# EAGLE board compilacion ws2812b br (EAGLE 7.3.0)
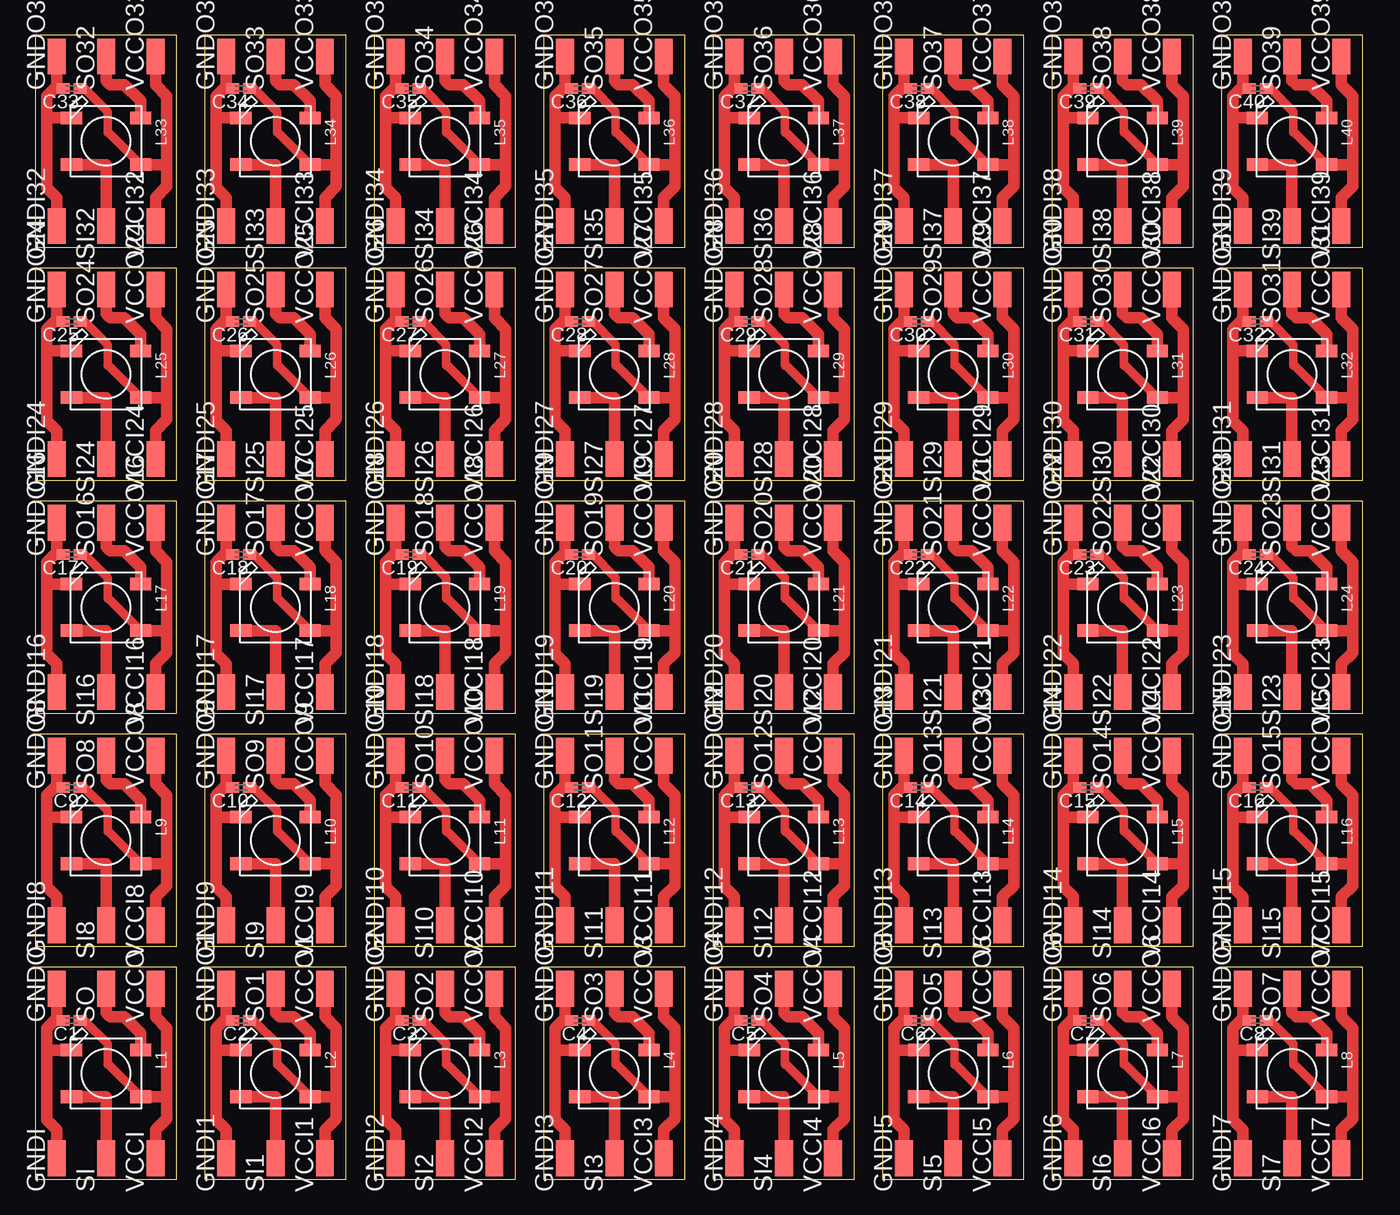
[diagram p0: board, top side]

Size 94 x 81 mm. Coordinates in mm from the lower left corner, seen from the top.
Outline: 0,0 10,0 10,15 0,15 0,0
Outline: 12,0 22,0 22,15 12,15 12,0
Outline: 24,0 34,0 34,15 24,15 24,0
Outline: 36,0 46,0 46,15 36,15 36,0
Outline: 48,0 58,0 58,15 48,15 48,0
Outline: 60,0 70,0 70,15 60,15 60,0
Outline: 72,0 82,0 82,15 72,15 72,0
Outline: 84,0 94,0 94,15 84,15 84,0
Outline: 0,16.5 10,16.5 10,31.5 0,31.5 0,16.5
Outline: 12,16.5 22,16.5 22,31.5 12,31.5 12,16.5
Outline: 24,16.5 34,16.5 34,31.5 24,31.5 24,16.5
Outline: 36,16.5 46,16.5 46,31.5 36,31.5 36,16.5
Outline: 48,16.5 58,16.5 58,31.5 48,31.5 48,16.5
Outline: 60,16.5 70,16.5 70,31.5 60,31.5 60,16.5
Outline: 72,16.5 82,16.5 82,31.5 72,31.5 72,16.5
Outline: 84,16.5 94,16.5 94,31.5 84,31.5 84,16.5
Outline: 0,33 10,33 10,48 0,48 0,33
Outline: 12,33 22,33 22,48 12,48 12,33
Outline: 24,33 34,33 34,48 24,48 24,33
Outline: 36,33 46,33 46,48 36,48 36,33
Outline: 48,33 58,33 58,48 48,48 48,33
Outline: 60,33 70,33 70,48 60,48 60,33
Outline: 72,33 82,33 82,48 72,48 72,33
Outline: 84,33 94,33 94,48 84,48 84,33
Outline: 0,49.5 10,49.5 10,64.5 0,64.5 0,49.5
Outline: 12,49.5 22,49.5 22,64.5 12,64.5 12,49.5
Outline: 24,49.5 34,49.5 34,64.5 24,64.5 24,49.5
Outline: 36,49.5 46,49.5 46,64.5 36,64.5 36,49.5
Outline: 48,49.5 58,49.5 58,64.5 48,64.5 48,49.5
Outline: 60,49.5 70,49.5 70,64.5 60,64.5 60,49.5
Outline: 72,49.5 82,49.5 82,64.5 72,64.5 72,49.5
Outline: 84,49.5 94,49.5 94,64.5 84,64.5 84,49.5
Outline: 0,66 10,66 10,81 0,81 0,66
Outline: 12,66 22,66 22,81 12,81 12,66
Outline: 24,66 34,66 34,81 24,81 24,66
Outline: 36,66 46,66 46,81 36,81 36,66
Outline: 48,66 58,66 58,81 48,81 48,66
Outline: 60,66 70,66 70,81 60,81 60,66
Outline: 72,66 82,66 82,81 72,81 72,66
Outline: 84,66 94,66 94,81 84,81 84,66
Copper layers (1*16): Top 0.035mm / dielectric 1.5mm / Bottom 0.035mm
Design rules "default": minimum track width 10mil, minimum drill 24mil, track to track 8mil, track to pad 8mil, pad to pad 8mil, via to via 8mil, smd to smd 8mil, copper to edge 40mil, drill to drill 8mil, minimum pad ring 10mil, minimum via ring 8mil, stop-mask expansion 4mil, vias tented up to drill 0mil, thermal gap 10mil

## Footprints (pad centres in the part's own frame; a part is rotated, then mirrored left to right if it is on the bottom)
C0402K = smd 0.925 x 0.74: 1 -0.6,0; 2 0.6,0
SMD1,27-2,54 = smd 1.27 x 2.54: 1 0,0
WS2812B = smd 1.5 x 0.9: 1-VDD 2.45,-1.65; 2-DOUT 2.45,1.65; 3-GND -2.45,1.65; 4-DIN -2.45,-1.65

## Placement (x,y rotation side)
C1  0.1uF  [C0402K]  2.57,11.24 180 top
C2  0.1uF  [C0402K]  14.57,11.24 180 top
C3  0.1uF  [C0402K]  26.57,11.24 180 top
C4  0.1uF  [C0402K]  38.57,11.24 180 top
C5  0.1uF  [C0402K]  50.57,11.24 180 top
C6  0.1uF  [C0402K]  62.57,11.24 180 top
C7  0.1uF  [C0402K]  74.57,11.24 180 top
C8  0.1uF  [C0402K]  86.57,11.24 180 top
C9  0.1uF  [C0402K]  2.57,27.74 180 top
C10  0.1uF  [C0402K]  14.57,27.74 180 top
C11  0.1uF  [C0402K]  26.57,27.74 180 top
C12  0.1uF  [C0402K]  38.57,27.74 180 top
C13  0.1uF  [C0402K]  50.57,27.74 180 top
C14  0.1uF  [C0402K]  62.57,27.74 180 top
C15  0.1uF  [C0402K]  74.57,27.74 180 top
C16  0.1uF  [C0402K]  86.57,27.74 180 top
C17  0.1uF  [C0402K]  2.57,44.24 180 top
C18  0.1uF  [C0402K]  14.57,44.24 180 top
C19  0.1uF  [C0402K]  26.57,44.24 180 top
C20  0.1uF  [C0402K]  38.57,44.24 180 top
C21  0.1uF  [C0402K]  50.57,44.24 180 top
C22  0.1uF  [C0402K]  62.57,44.24 180 top
C23  0.1uF  [C0402K]  74.57,44.24 180 top
C24  0.1uF  [C0402K]  86.57,44.24 180 top
C25  0.1uF  [C0402K]  2.57,60.74 180 top
C26  0.1uF  [C0402K]  14.57,60.74 180 top
C27  0.1uF  [C0402K]  26.57,60.74 180 top
C28  0.1uF  [C0402K]  38.57,60.74 180 top
C29  0.1uF  [C0402K]  50.57,60.74 180 top
C30  0.1uF  [C0402K]  62.57,60.74 180 top
C31  0.1uF  [C0402K]  74.57,60.74 180 top
C32  0.1uF  [C0402K]  86.57,60.74 180 top
C33  0.1uF  [C0402K]  2.57,77.24 180 top
C34  0.1uF  [C0402K]  14.57,77.24 180 top
C35  0.1uF  [C0402K]  26.57,77.24 180 top
C36  0.1uF  [C0402K]  38.57,77.24 180 top
C37  0.1uF  [C0402K]  50.57,77.24 180 top
C38  0.1uF  [C0402K]  62.57,77.24 180 top
C39  0.1uF  [C0402K]  74.57,77.24 180 top
C40  0.1uF  [C0402K]  86.57,77.24 180 top
GNDI  [SMD1,27-2,54]  1.5,1.5 0 top
GNDI1  [SMD1,27-2,54]  13.5,1.5 0 top
GNDI2  [SMD1,27-2,54]  25.5,1.5 0 top
GNDI3  [SMD1,27-2,54]  37.5,1.5 0 top
GNDI4  [SMD1,27-2,54]  49.5,1.5 0 top
GNDI5  [SMD1,27-2,54]  61.5,1.5 0 top
GNDI6  [SMD1,27-2,54]  73.5,1.5 0 top
GNDI7  [SMD1,27-2,54]  85.5,1.5 0 top
GNDI8  [SMD1,27-2,54]  1.5,18 0 top
GNDI9  [SMD1,27-2,54]  13.5,18 0 top
GNDI10  [SMD1,27-2,54]  25.5,18 0 top
GNDI11  [SMD1,27-2,54]  37.5,18 0 top
GNDI12  [SMD1,27-2,54]  49.5,18 0 top
GNDI13  [SMD1,27-2,54]  61.5,18 0 top
GNDI14  [SMD1,27-2,54]  73.5,18 0 top
GNDI15  [SMD1,27-2,54]  85.5,18 0 top
GNDI16  [SMD1,27-2,54]  1.5,34.5 0 top
GNDI17  [SMD1,27-2,54]  13.5,34.5 0 top
GNDI18  [SMD1,27-2,54]  25.5,34.5 0 top
GNDI19  [SMD1,27-2,54]  37.5,34.5 0 top
GNDI20  [SMD1,27-2,54]  49.5,34.5 0 top
GNDI21  [SMD1,27-2,54]  61.5,34.5 0 top
GNDI22  [SMD1,27-2,54]  73.5,34.5 0 top
GNDI23  [SMD1,27-2,54]  85.5,34.5 0 top
GNDI24  [SMD1,27-2,54]  1.5,51 0 top
GNDI25  [SMD1,27-2,54]  13.5,51 0 top
GNDI26  [SMD1,27-2,54]  25.5,51 0 top
GNDI27  [SMD1,27-2,54]  37.5,51 0 top
GNDI28  [SMD1,27-2,54]  49.5,51 0 top
GNDI29  [SMD1,27-2,54]  61.5,51 0 top
GNDI30  [SMD1,27-2,54]  73.5,51 0 top
GNDI31  [SMD1,27-2,54]  85.5,51 0 top
GNDI32  [SMD1,27-2,54]  1.5,67.5 0 top
GNDI33  [SMD1,27-2,54]  13.5,67.5 0 top
GNDI34  [SMD1,27-2,54]  25.5,67.5 0 top
GNDI35  [SMD1,27-2,54]  37.5,67.5 0 top
GNDI36  [SMD1,27-2,54]  49.5,67.5 0 top
GNDI37  [SMD1,27-2,54]  61.5,67.5 0 top
GNDI38  [SMD1,27-2,54]  73.5,67.5 0 top
GNDI39  [SMD1,27-2,54]  85.5,67.5 0 top
GNDO  [SMD1,27-2,54]  1.5,13.5 0 top
GNDO1  [SMD1,27-2,54]  13.5,13.5 0 top
GNDO2  [SMD1,27-2,54]  25.5,13.5 0 top
GNDO3  [SMD1,27-2,54]  37.5,13.5 0 top
GNDO4  [SMD1,27-2,54]  49.5,13.5 0 top
GNDO5  [SMD1,27-2,54]  61.5,13.5 0 top
GNDO6  [SMD1,27-2,54]  73.5,13.5 0 top
GNDO7  [SMD1,27-2,54]  85.5,13.5 0 top
GNDO8  [SMD1,27-2,54]  1.5,30 0 top
GNDO9  [SMD1,27-2,54]  13.5,30 0 top
GNDO10  [SMD1,27-2,54]  25.5,30 0 top
GNDO11  [SMD1,27-2,54]  37.5,30 0 top
GNDO12  [SMD1,27-2,54]  49.5,30 0 top
GNDO13  [SMD1,27-2,54]  61.5,30 0 top
GNDO14  [SMD1,27-2,54]  73.5,30 0 top
GNDO15  [SMD1,27-2,54]  85.5,30 0 top
GNDO16  [SMD1,27-2,54]  1.5,46.5 0 top
GNDO17  [SMD1,27-2,54]  13.5,46.5 0 top
GNDO18  [SMD1,27-2,54]  25.5,46.5 0 top
GNDO19  [SMD1,27-2,54]  37.5,46.5 0 top
GNDO20  [SMD1,27-2,54]  49.5,46.5 0 top
GNDO21  [SMD1,27-2,54]  61.5,46.5 0 top
GNDO22  [SMD1,27-2,54]  73.5,46.5 0 top
GNDO23  [SMD1,27-2,54]  85.5,46.5 0 top
GNDO24  [SMD1,27-2,54]  1.5,63 0 top
GNDO25  [SMD1,27-2,54]  13.5,63 0 top
GNDO26  [SMD1,27-2,54]  25.5,63 0 top
GNDO27  [SMD1,27-2,54]  37.5,63 0 top
GNDO28  [SMD1,27-2,54]  49.5,63 0 top
GNDO29  [SMD1,27-2,54]  61.5,63 0 top
GNDO30  [SMD1,27-2,54]  73.5,63 0 top
GNDO31  [SMD1,27-2,54]  85.5,63 0 top
GNDO32  [SMD1,27-2,54]  1.5,79.5 0 top
GNDO33  [SMD1,27-2,54]  13.5,79.5 0 top
GNDO34  [SMD1,27-2,54]  25.5,79.5 0 top
GNDO35  [SMD1,27-2,54]  37.5,79.5 0 top
GNDO36  [SMD1,27-2,54]  49.5,79.5 0 top
GNDO37  [SMD1,27-2,54]  61.5,79.5 0 top
GNDO38  [SMD1,27-2,54]  73.5,79.5 0 top
GNDO39  [SMD1,27-2,54]  85.5,79.5 0 top
L1  WS2812B  [WS2812B]  5,7.5 0 top
L2  WS2812B  [WS2812B]  17,7.5 0 top
L3  WS2812B  [WS2812B]  29,7.5 0 top
L4  WS2812B  [WS2812B]  41,7.5 0 top
L5  WS2812B  [WS2812B]  53,7.5 0 top
L6  WS2812B  [WS2812B]  65,7.5 0 top
L7  WS2812B  [WS2812B]  77,7.5 0 top
L8  WS2812B  [WS2812B]  89,7.5 0 top
L9  WS2812B  [WS2812B]  5,24 0 top
L10  WS2812B  [WS2812B]  17,24 0 top
L11  WS2812B  [WS2812B]  29,24 0 top
L12  WS2812B  [WS2812B]  41,24 0 top
L13  WS2812B  [WS2812B]  53,24 0 top
L14  WS2812B  [WS2812B]  65,24 0 top
L15  WS2812B  [WS2812B]  77,24 0 top
L16  WS2812B  [WS2812B]  89,24 0 top
L17  WS2812B  [WS2812B]  5,40.5 0 top
L18  WS2812B  [WS2812B]  17,40.5 0 top
L19  WS2812B  [WS2812B]  29,40.5 0 top
L20  WS2812B  [WS2812B]  41,40.5 0 top
L21  WS2812B  [WS2812B]  53,40.5 0 top
L22  WS2812B  [WS2812B]  65,40.5 0 top
L23  WS2812B  [WS2812B]  77,40.5 0 top
L24  WS2812B  [WS2812B]  89,40.5 0 top
L25  WS2812B  [WS2812B]  5,57 0 top
L26  WS2812B  [WS2812B]  17,57 0 top
L27  WS2812B  [WS2812B]  29,57 0 top
L28  WS2812B  [WS2812B]  41,57 0 top
L29  WS2812B  [WS2812B]  53,57 0 top
L30  WS2812B  [WS2812B]  65,57 0 top
L31  WS2812B  [WS2812B]  77,57 0 top
L32  WS2812B  [WS2812B]  89,57 0 top
L33  WS2812B  [WS2812B]  5,73.5 0 top
L34  WS2812B  [WS2812B]  17,73.5 0 top
L35  WS2812B  [WS2812B]  29,73.5 0 top
L36  WS2812B  [WS2812B]  41,73.5 0 top
L37  WS2812B  [WS2812B]  53,73.5 0 top
L38  WS2812B  [WS2812B]  65,73.5 0 top
L39  WS2812B  [WS2812B]  77,73.5 0 top
L40  WS2812B  [WS2812B]  89,73.5 0 top
SI  [SMD1,27-2,54]  5,1.5 0 top
SI1  [SMD1,27-2,54]  17,1.5 0 top
SI2  [SMD1,27-2,54]  29,1.5 0 top
SI3  [SMD1,27-2,54]  41,1.5 0 top
SI4  [SMD1,27-2,54]  53,1.5 0 top
SI5  [SMD1,27-2,54]  65,1.5 0 top
SI6  [SMD1,27-2,54]  77,1.5 0 top
SI7  [SMD1,27-2,54]  89,1.5 0 top
SI8  [SMD1,27-2,54]  5,18 0 top
SI9  [SMD1,27-2,54]  17,18 0 top
SI10  [SMD1,27-2,54]  29,18 0 top
SI11  [SMD1,27-2,54]  41,18 0 top
SI12  [SMD1,27-2,54]  53,18 0 top
SI13  [SMD1,27-2,54]  65,18 0 top
SI14  [SMD1,27-2,54]  77,18 0 top
SI15  [SMD1,27-2,54]  89,18 0 top
SI16  [SMD1,27-2,54]  5,34.5 0 top
SI17  [SMD1,27-2,54]  17,34.5 0 top
SI18  [SMD1,27-2,54]  29,34.5 0 top
SI19  [SMD1,27-2,54]  41,34.5 0 top
SI20  [SMD1,27-2,54]  53,34.5 0 top
SI21  [SMD1,27-2,54]  65,34.5 0 top
SI22  [SMD1,27-2,54]  77,34.5 0 top
SI23  [SMD1,27-2,54]  89,34.5 0 top
SI24  [SMD1,27-2,54]  5,51 0 top
SI25  [SMD1,27-2,54]  17,51 0 top
SI26  [SMD1,27-2,54]  29,51 0 top
SI27  [SMD1,27-2,54]  41,51 0 top
SI28  [SMD1,27-2,54]  53,51 0 top
SI29  [SMD1,27-2,54]  65,51 0 top
SI30  [SMD1,27-2,54]  77,51 0 top
SI31  [SMD1,27-2,54]  89,51 0 top
SI32  [SMD1,27-2,54]  5,67.5 0 top
SI33  [SMD1,27-2,54]  17,67.5 0 top
SI34  [SMD1,27-2,54]  29,67.5 0 top
SI35  [SMD1,27-2,54]  41,67.5 0 top
SI36  [SMD1,27-2,54]  53,67.5 0 top
SI37  [SMD1,27-2,54]  65,67.5 0 top
SI38  [SMD1,27-2,54]  77,67.5 0 top
SI39  [SMD1,27-2,54]  89,67.5 0 top
SO  [SMD1,27-2,54]  5,13.5 0 top
SO1  [SMD1,27-2,54]  17,13.5 0 top
SO2  [SMD1,27-2,54]  29,13.5 0 top
SO3  [SMD1,27-2,54]  41,13.5 0 top
SO4  [SMD1,27-2,54]  53,13.5 0 top
SO5  [SMD1,27-2,54]  65,13.5 0 top
SO6  [SMD1,27-2,54]  77,13.5 0 top
SO7  [SMD1,27-2,54]  89,13.5 0 top
SO8  [SMD1,27-2,54]  5,30 0 top
SO9  [SMD1,27-2,54]  17,30 0 top
SO10  [SMD1,27-2,54]  29,30 0 top
SO11  [SMD1,27-2,54]  41,30 0 top
SO12  [SMD1,27-2,54]  53,30 0 top
SO13  [SMD1,27-2,54]  65,30 0 top
SO14  [SMD1,27-2,54]  77,30 0 top
SO15  [SMD1,27-2,54]  89,30 0 top
SO16  [SMD1,27-2,54]  5,46.5 0 top
SO17  [SMD1,27-2,54]  17,46.5 0 top
SO18  [SMD1,27-2,54]  29,46.5 0 top
SO19  [SMD1,27-2,54]  41,46.5 0 top
SO20  [SMD1,27-2,54]  53,46.5 0 top
SO21  [SMD1,27-2,54]  65,46.5 0 top
SO22  [SMD1,27-2,54]  77,46.5 0 top
SO23  [SMD1,27-2,54]  89,46.5 0 top
SO24  [SMD1,27-2,54]  5,63 0 top
SO25  [SMD1,27-2,54]  17,63 0 top
SO26  [SMD1,27-2,54]  29,63 0 top
SO27  [SMD1,27-2,54]  41,63 0 top
SO28  [SMD1,27-2,54]  53,63 0 top
SO29  [SMD1,27-2,54]  65,63 0 top
SO30  [SMD1,27-2,54]  77,63 0 top
SO31  [SMD1,27-2,54]  89,63 0 top
SO32  [SMD1,27-2,54]  5,79.5 0 top
SO33  [SMD1,27-2,54]  17,79.5 0 top
SO34  [SMD1,27-2,54]  29,79.5 0 top
SO35  [SMD1,27-2,54]  41,79.5 0 top
SO36  [SMD1,27-2,54]  53,79.5 0 top
SO37  [SMD1,27-2,54]  65,79.5 0 top
SO38  [SMD1,27-2,54]  77,79.5 0 top
SO39  [SMD1,27-2,54]  89,79.5 0 top
VCCI  [SMD1,27-2,54]  8.5,1.5 0 top
VCCI1  [SMD1,27-2,54]  20.5,1.5 0 top
VCCI2  [SMD1,27-2,54]  32.5,1.5 0 top
VCCI3  [SMD1,27-2,54]  44.5,1.5 0 top
VCCI4  [SMD1,27-2,54]  56.5,1.5 0 top
VCCI5  [SMD1,27-2,54]  68.5,1.5 0 top
VCCI6  [SMD1,27-2,54]  80.5,1.5 0 top
VCCI7  [SMD1,27-2,54]  92.5,1.5 0 top
VCCI8  [SMD1,27-2,54]  8.5,18 0 top
VCCI9  [SMD1,27-2,54]  20.5,18 0 top
VCCI10  [SMD1,27-2,54]  32.5,18 0 top
VCCI11  [SMD1,27-2,54]  44.5,18 0 top
VCCI12  [SMD1,27-2,54]  56.5,18 0 top
VCCI13  [SMD1,27-2,54]  68.5,18 0 top
VCCI14  [SMD1,27-2,54]  80.5,18 0 top
VCCI15  [SMD1,27-2,54]  92.5,18 0 top
VCCI16  [SMD1,27-2,54]  8.5,34.5 0 top
VCCI17  [SMD1,27-2,54]  20.5,34.5 0 top
VCCI18  [SMD1,27-2,54]  32.5,34.5 0 top
VCCI19  [SMD1,27-2,54]  44.5,34.5 0 top
VCCI20  [SMD1,27-2,54]  56.5,34.5 0 top
VCCI21  [SMD1,27-2,54]  68.5,34.5 0 top
VCCI22  [SMD1,27-2,54]  80.5,34.5 0 top
VCCI23  [SMD1,27-2,54]  92.5,34.5 0 top
VCCI24  [SMD1,27-2,54]  8.5,51 0 top
VCCI25  [SMD1,27-2,54]  20.5,51 0 top
VCCI26  [SMD1,27-2,54]  32.5,51 0 top
VCCI27  [SMD1,27-2,54]  44.5,51 0 top
VCCI28  [SMD1,27-2,54]  56.5,51 0 top
VCCI29  [SMD1,27-2,54]  68.5,51 0 top
VCCI30  [SMD1,27-2,54]  80.5,51 0 top
VCCI31  [SMD1,27-2,54]  92.5,51 0 top
VCCI32  [SMD1,27-2,54]  8.5,67.5 0 top
VCCI33  [SMD1,27-2,54]  20.5,67.5 0 top
VCCI34  [SMD1,27-2,54]  32.5,67.5 0 top
VCCI35  [SMD1,27-2,54]  44.5,67.5 0 top
VCCI36  [SMD1,27-2,54]  56.5,67.5 0 top
VCCI37  [SMD1,27-2,54]  68.5,67.5 0 top
VCCI38  [SMD1,27-2,54]  80.5,67.5 0 top
VCCI39  [SMD1,27-2,54]  92.5,67.5 0 top
VCCO  [SMD1,27-2,54]  8.5,13.5 0 top
VCCO1  [SMD1,27-2,54]  20.5,13.5 0 top
VCCO2  [SMD1,27-2,54]  32.5,13.5 0 top
VCCO3  [SMD1,27-2,54]  44.5,13.5 0 top
VCCO4  [SMD1,27-2,54]  56.5,13.5 0 top
VCCO5  [SMD1,27-2,54]  68.5,13.5 0 top
VCCO6  [SMD1,27-2,54]  80.5,13.5 0 top
VCCO7  [SMD1,27-2,54]  92.5,13.5 0 top
VCCO8  [SMD1,27-2,54]  8.5,30 0 top
VCCO9  [SMD1,27-2,54]  20.5,30 0 top
VCCO10  [SMD1,27-2,54]  32.5,30 0 top
VCCO11  [SMD1,27-2,54]  44.5,30 0 top
VCCO12  [SMD1,27-2,54]  56.5,30 0 top
VCCO13  [SMD1,27-2,54]  68.5,30 0 top
VCCO14  [SMD1,27-2,54]  80.5,30 0 top
VCCO15  [SMD1,27-2,54]  92.5,30 0 top
VCCO16  [SMD1,27-2,54]  8.5,46.5 0 top
VCCO17  [SMD1,27-2,54]  20.5,46.5 0 top
VCCO18  [SMD1,27-2,54]  32.5,46.5 0 top
VCCO19  [SMD1,27-2,54]  44.5,46.5 0 top
VCCO20  [SMD1,27-2,54]  56.5,46.5 0 top
VCCO21  [SMD1,27-2,54]  68.5,46.5 0 top
VCCO22  [SMD1,27-2,54]  80.5,46.5 0 top
VCCO23  [SMD1,27-2,54]  92.5,46.5 0 top
VCCO24  [SMD1,27-2,54]  8.5,63 0 top
VCCO25  [SMD1,27-2,54]  20.5,63 0 top
VCCO26  [SMD1,27-2,54]  32.5,63 0 top
VCCO27  [SMD1,27-2,54]  44.5,63 0 top
VCCO28  [SMD1,27-2,54]  56.5,63 0 top
VCCO29  [SMD1,27-2,54]  68.5,63 0 top
VCCO30  [SMD1,27-2,54]  80.5,63 0 top
VCCO31  [SMD1,27-2,54]  92.5,63 0 top
VCCO32  [SMD1,27-2,54]  8.5,79.5 0 top
VCCO33  [SMD1,27-2,54]  20.5,79.5 0 top
VCCO34  [SMD1,27-2,54]  32.5,79.5 0 top
VCCO35  [SMD1,27-2,54]  44.5,79.5 0 top
VCCO36  [SMD1,27-2,54]  56.5,79.5 0 top
VCCO37  [SMD1,27-2,54]  68.5,79.5 0 top
VCCO38  [SMD1,27-2,54]  80.5,79.5 0 top
VCCO39  [SMD1,27-2,54]  92.5,79.5 0 top

## Library data of the parts
C1-C40 L1-L40 = adafruit
GNDI GNDI1-GNDI39 GNDO GNDO1-GNDO39 SI SI1-SI39 SO SO1-SO39 VCCI VCCI1-VCCI39 VCCO VCCO1-VCCO39 = wirepad

## Nets
N$1: C1.2 GNDI.1 GNDO.1 L1.3-GND
N$2: C1.1 L1.1-VDD VCCI.1 VCCO.1
N$3: L1.4-DIN SI.1
N$4: L1.2-DOUT SO.1
N$5: C2.2 GNDI1.1 GNDO1.1 L2.3-GND
N$6: C2.1 L2.1-VDD VCCI1.1 VCCO1.1
N$7: L2.4-DIN SI1.1
N$8: L2.2-DOUT SO1.1
N$9: C3.2 GNDI2.1 GNDO2.1 L3.3-GND
N$10: C3.1 L3.1-VDD VCCI2.1 VCCO2.1
N$11: L3.4-DIN SI2.1
N$12: L3.2-DOUT SO2.1
N$13: C4.2 GNDI3.1 GNDO3.1 L4.3-GND
N$14: C4.1 L4.1-VDD VCCI3.1 VCCO3.1
N$15: L4.4-DIN SI3.1
N$16: L4.2-DOUT SO3.1
N$17: C5.2 GNDI4.1 GNDO4.1 L5.3-GND
N$18: C5.1 L5.1-VDD VCCI4.1 VCCO4.1
N$19: L5.4-DIN SI4.1
N$20: L5.2-DOUT SO4.1
N$21: C6.2 GNDI5.1 GNDO5.1 L6.3-GND
N$22: C6.1 L6.1-VDD VCCI5.1 VCCO5.1
N$23: L6.4-DIN SI5.1
N$24: L6.2-DOUT SO5.1
N$25: C7.2 GNDI6.1 GNDO6.1 L7.3-GND
N$26: C7.1 L7.1-VDD VCCI6.1 VCCO6.1
N$27: L7.4-DIN SI6.1
N$28: L7.2-DOUT SO6.1
N$29: C8.2 GNDI7.1 GNDO7.1 L8.3-GND
N$30: C8.1 L8.1-VDD VCCI7.1 VCCO7.1
N$31: L8.4-DIN SI7.1
N$32: L8.2-DOUT SO7.1
N$33: C9.2 GNDI8.1 GNDO8.1 L9.3-GND
N$34: C9.1 L9.1-VDD VCCI8.1 VCCO8.1
N$35: L9.4-DIN SI8.1
N$36: L9.2-DOUT SO8.1
N$37: C10.2 GNDI9.1 GNDO9.1 L10.3-GND
N$38: C10.1 L10.1-VDD VCCI9.1 VCCO9.1
N$39: L10.4-DIN SI9.1
N$40: L10.2-DOUT SO9.1
N$41: C11.2 GNDI10.1 GNDO10.1 L11.3-GND
N$42: C11.1 L11.1-VDD VCCI10.1 VCCO10.1
N$43: L11.4-DIN SI10.1
N$44: L11.2-DOUT SO10.1
N$45: C12.2 GNDI11.1 GNDO11.1 L12.3-GND
N$46: C12.1 L12.1-VDD VCCI11.1 VCCO11.1
N$47: L12.4-DIN SI11.1
N$48: L12.2-DOUT SO11.1
N$49: C13.2 GNDI12.1 GNDO12.1 L13.3-GND
N$50: C13.1 L13.1-VDD VCCI12.1 VCCO12.1
N$51: L13.4-DIN SI12.1
N$52: L13.2-DOUT SO12.1
N$53: C14.2 GNDI13.1 GNDO13.1 L14.3-GND
N$54: C14.1 L14.1-VDD VCCI13.1 VCCO13.1
N$55: L14.4-DIN SI13.1
N$56: L14.2-DOUT SO13.1
N$57: C15.2 GNDI14.1 GNDO14.1 L15.3-GND
N$58: C15.1 L15.1-VDD VCCI14.1 VCCO14.1
N$59: L15.4-DIN SI14.1
N$60: L15.2-DOUT SO14.1
N$61: C16.2 GNDI15.1 GNDO15.1 L16.3-GND
N$62: C16.1 L16.1-VDD VCCI15.1 VCCO15.1
N$63: L16.4-DIN SI15.1
N$64: L16.2-DOUT SO15.1
N$65: C17.2 GNDI16.1 GNDO16.1 L17.3-GND
N$66: C17.1 L17.1-VDD VCCI16.1 VCCO16.1
N$67: L17.4-DIN SI16.1
N$68: L17.2-DOUT SO16.1
N$69: C18.2 GNDI17.1 GNDO17.1 L18.3-GND
N$70: C18.1 L18.1-VDD VCCI17.1 VCCO17.1
N$71: L18.4-DIN SI17.1
N$72: L18.2-DOUT SO17.1
N$73: C19.2 GNDI18.1 GNDO18.1 L19.3-GND
N$74: C19.1 L19.1-VDD VCCI18.1 VCCO18.1
N$75: L19.4-DIN SI18.1
N$76: L19.2-DOUT SO18.1
N$77: C20.2 GNDI19.1 GNDO19.1 L20.3-GND
N$78: C20.1 L20.1-VDD VCCI19.1 VCCO19.1
N$79: L20.4-DIN SI19.1
N$80: L20.2-DOUT SO19.1
N$81: C21.2 GNDI20.1 GNDO20.1 L21.3-GND
N$82: C21.1 L21.1-VDD VCCI20.1 VCCO20.1
N$83: L21.4-DIN SI20.1
N$84: L21.2-DOUT SO20.1
N$85: C22.2 GNDI21.1 GNDO21.1 L22.3-GND
N$86: C22.1 L22.1-VDD VCCI21.1 VCCO21.1
N$87: L22.4-DIN SI21.1
N$88: L22.2-DOUT SO21.1
N$89: C23.2 GNDI22.1 GNDO22.1 L23.3-GND
N$90: C23.1 L23.1-VDD VCCI22.1 VCCO22.1
N$91: L23.4-DIN SI22.1
N$92: L23.2-DOUT SO22.1
N$93: C24.2 GNDI23.1 GNDO23.1 L24.3-GND
N$94: C24.1 L24.1-VDD VCCI23.1 VCCO23.1
N$95: L24.4-DIN SI23.1
N$96: L24.2-DOUT SO23.1
N$97: C25.2 GNDI24.1 GNDO24.1 L25.3-GND
N$98: C25.1 L25.1-VDD VCCI24.1 VCCO24.1
N$99: L25.4-DIN SI24.1
N$100: L25.2-DOUT SO24.1
N$101: C26.2 GNDI25.1 GNDO25.1 L26.3-GND
N$102: C26.1 L26.1-VDD VCCI25.1 VCCO25.1
N$103: L26.4-DIN SI25.1
N$104: L26.2-DOUT SO25.1
N$105: C27.2 GNDI26.1 GNDO26.1 L27.3-GND
N$106: C27.1 L27.1-VDD VCCI26.1 VCCO26.1
N$107: L27.4-DIN SI26.1
N$108: L27.2-DOUT SO26.1
N$109: C28.2 GNDI27.1 GNDO27.1 L28.3-GND
N$110: C28.1 L28.1-VDD VCCI27.1 VCCO27.1
N$111: L28.4-DIN SI27.1
N$112: L28.2-DOUT SO27.1
N$113: C29.2 GNDI28.1 GNDO28.1 L29.3-GND
N$114: C29.1 L29.1-VDD VCCI28.1 VCCO28.1
N$115: L29.4-DIN SI28.1
N$116: L29.2-DOUT SO28.1
N$117: C30.2 GNDI29.1 GNDO29.1 L30.3-GND
N$118: C30.1 L30.1-VDD VCCI29.1 VCCO29.1
N$119: L30.4-DIN SI29.1
N$120: L30.2-DOUT SO29.1
N$121: C31.2 GNDI30.1 GNDO30.1 L31.3-GND
N$122: C31.1 L31.1-VDD VCCI30.1 VCCO30.1
N$123: L31.4-DIN SI30.1
N$124: L31.2-DOUT SO30.1
N$125: C32.2 GNDI31.1 GNDO31.1 L32.3-GND
N$126: C32.1 L32.1-VDD VCCI31.1 VCCO31.1
N$127: L32.4-DIN SI31.1
N$128: L32.2-DOUT SO31.1
N$129: C33.2 GNDI32.1 GNDO32.1 L33.3-GND
N$130: C33.1 L33.1-VDD VCCI32.1 VCCO32.1
N$131: L33.4-DIN SI32.1
N$132: L33.2-DOUT SO32.1
N$133: C34.2 GNDI33.1 GNDO33.1 L34.3-GND
N$134: C34.1 L34.1-VDD VCCI33.1 VCCO33.1
N$135: L34.4-DIN SI33.1
N$136: L34.2-DOUT SO33.1
N$137: C35.2 GNDI34.1 GNDO34.1 L35.3-GND
N$138: C35.1 L35.1-VDD VCCI34.1 VCCO34.1
N$139: L35.4-DIN SI34.1
N$140: L35.2-DOUT SO34.1
N$141: C36.2 GNDI35.1 GNDO35.1 L36.3-GND
N$142: C36.1 L36.1-VDD VCCI35.1 VCCO35.1
N$143: L36.4-DIN SI35.1
N$144: L36.2-DOUT SO35.1
N$145: C37.2 GNDI36.1 GNDO36.1 L37.3-GND
N$146: C37.1 L37.1-VDD VCCI36.1 VCCO36.1
N$147: L37.4-DIN SI36.1
N$148: L37.2-DOUT SO36.1
N$149: C38.2 GNDI37.1 GNDO37.1 L38.3-GND
N$150: C38.1 L38.1-VDD VCCI37.1 VCCO37.1
N$151: L38.4-DIN SI37.1
N$152: L38.2-DOUT SO37.1
N$153: C39.2 GNDI38.1 GNDO38.1 L39.3-GND
N$154: C39.1 L39.1-VDD VCCI38.1 VCCO38.1
N$155: L39.4-DIN SI38.1
N$156: L39.2-DOUT SO38.1
N$157: C40.2 GNDI39.1 GNDO39.1 L40.3-GND
N$158: C40.1 L40.1-VDD VCCI39.1 VCCO39.1
N$159: L40.4-DIN SI39.1
N$160: L40.2-DOUT SO39.1

## Tracks (layer width: path | path; a pad name or v marks a point on that pad's centre or on a via)
N$1
  Top 0.61: C1.2 1.66,11.24 1.5,11.4
  Top 0.813: GNDI.1 1.5,3.5 0.8,4.2 0.8,9 | 0.8,9 0.8,10.7 1.5,11.4 GNDO.1 | L1.3-GND 0.95,9.15 0.8,9
N$2
  Top 0.61: C1.1 3.46,11.24 5.1,9.6 5.1,8.1 5.2,8.1 L1.1-VDD
  Top 0.813: VCCI.1 8.5,3.5 9.3,4.3 9.3,5.8 | 9.3,5.8 9.3,10.7 8.5,11.5 VCCO.1 | L1.1-VDD 9.25,5.85 9.3,5.8
N$3
  Top 0.813: L1.4-DIN 5,5.85 SI.1
N$4
  Top 0.813: L1.2-DOUT 7.45,10.35 6.3,11.5 5.3,11.5 5,11.8 SO.1
N$5
  Top 0.61: C2.2 13.66,11.24 13.5,11.4
  Top 0.813: GNDI1.1 13.5,3.5 12.8,4.2 12.8,9 | 12.8,9 12.8,10.7 13.5,11.4 GNDO1.1 | L2.3-GND 12.95,9.15 12.8,9
N$6
  Top 0.61: C2.1 15.46,11.24 17.1,9.6 17.1,8.1 17.2,8.1 L2.1-VDD
  Top 0.813: VCCI1.1 20.5,3.5 21.3,4.3 21.3,5.8 | 21.3,5.8 21.3,10.7 20.5,11.5 VCCO1.1 | L2.1-VDD 21.25,5.85 21.3,5.8
N$7
  Top 0.813: L2.4-DIN 17,5.85 SI1.1
N$8
  Top 0.813: L2.2-DOUT 19.45,10.35 18.3,11.5 17.3,11.5 17,11.8 SO1.1
N$9
  Top 0.61: C3.2 25.66,11.24 25.5,11.4
  Top 0.813: GNDI2.1 25.5,3.5 24.8,4.2 24.8,9 | 24.8,9 24.8,10.7 25.5,11.4 GNDO2.1 | L3.3-GND 24.95,9.15 24.8,9
N$10
  Top 0.61: C3.1 27.46,11.24 29.1,9.6 29.1,8.1 29.2,8.1 L3.1-VDD
  Top 0.813: VCCI2.1 32.5,3.5 33.3,4.3 33.3,5.8 | 33.3,5.8 33.3,10.7 32.5,11.5 VCCO2.1 | L3.1-VDD 33.25,5.85 33.3,5.8
N$11
  Top 0.813: L3.4-DIN 29,5.85 SI2.1
N$12
  Top 0.813: L3.2-DOUT 31.45,10.35 30.3,11.5 29.3,11.5 29,11.8 SO2.1
N$13
  Top 0.61: C4.2 37.66,11.24 37.5,11.4
  Top 0.813: GNDI3.1 37.5,3.5 36.8,4.2 36.8,9 | 36.8,9 36.8,10.7 37.5,11.4 GNDO3.1 | L4.3-GND 36.95,9.15 36.8,9
N$14
  Top 0.61: C4.1 39.46,11.24 41.1,9.6 41.1,8.1 41.2,8.1 L4.1-VDD
  Top 0.813: VCCI3.1 44.5,3.5 45.3,4.3 45.3,5.8 | 45.3,5.8 45.3,10.7 44.5,11.5 VCCO3.1 | L4.1-VDD 45.25,5.85 45.3,5.8
N$15
  Top 0.813: L4.4-DIN 41,5.85 SI3.1
N$16
  Top 0.813: L4.2-DOUT 43.45,10.35 42.3,11.5 41.3,11.5 41,11.8 SO3.1
N$17
  Top 0.61: C5.2 49.66,11.24 49.5,11.4
  Top 0.813: GNDI4.1 49.5,3.5 48.8,4.2 48.8,9 | 48.8,9 48.8,10.7 49.5,11.4 GNDO4.1 | L5.3-GND 48.95,9.15 48.8,9
N$18
  Top 0.61: C5.1 51.46,11.24 53.1,9.6 53.1,8.1 53.2,8.1 L5.1-VDD
  Top 0.813: VCCI4.1 56.5,3.5 57.3,4.3 57.3,5.8 | 57.3,5.8 57.3,10.7 56.5,11.5 VCCO4.1 | L5.1-VDD 57.25,5.85 57.3,5.8
N$19
  Top 0.813: L5.4-DIN 53,5.85 SI4.1
N$20
  Top 0.813: L5.2-DOUT 55.45,10.35 54.3,11.5 53.3,11.5 53,11.8 SO4.1
N$21
  Top 0.61: C6.2 61.66,11.24 61.5,11.4
  Top 0.813: GNDI5.1 61.5,3.5 60.8,4.2 60.8,9 | 60.8,9 60.8,10.7 61.5,11.4 GNDO5.1 | L6.3-GND 60.95,9.15 60.8,9
N$22
  Top 0.61: C6.1 63.46,11.24 65.1,9.6 65.1,8.1 65.2,8.1 L6.1-VDD
  Top 0.813: VCCI5.1 68.5,3.5 69.3,4.3 69.3,5.8 | 69.3,5.8 69.3,10.7 68.5,11.5 VCCO5.1 | L6.1-VDD 69.25,5.85 69.3,5.8
N$23
  Top 0.813: L6.4-DIN 65,5.85 SI5.1
N$24
  Top 0.813: L6.2-DOUT 67.45,10.35 66.3,11.5 65.3,11.5 65,11.8 SO5.1
N$25
  Top 0.61: C7.2 73.66,11.24 73.5,11.4
  Top 0.813: GNDI6.1 73.5,3.5 72.8,4.2 72.8,9 | 72.8,9 72.8,10.7 73.5,11.4 GNDO6.1 | L7.3-GND 72.95,9.15 72.8,9
N$26
  Top 0.61: C7.1 75.46,11.24 77.1,9.6 77.1,8.1 77.2,8.1 L7.1-VDD
  Top 0.813: VCCI6.1 80.5,3.5 81.3,4.3 81.3,5.8 | 81.3,5.8 81.3,10.7 80.5,11.5 VCCO6.1 | L7.1-VDD 81.25,5.85 81.3,5.8
N$27
  Top 0.813: L7.4-DIN 77,5.85 SI6.1
N$28
  Top 0.813: L7.2-DOUT 79.45,10.35 78.3,11.5 77.3,11.5 77,11.8 SO6.1
N$29
  Top 0.61: C8.2 85.66,11.24 85.5,11.4
  Top 0.813: GNDI7.1 85.5,3.5 84.8,4.2 84.8,9 | 84.8,9 84.8,10.7 85.5,11.4 GNDO7.1 | L8.3-GND 84.95,9.15 84.8,9
N$30
  Top 0.61: C8.1 87.46,11.24 89.1,9.6 89.1,8.1 89.2,8.1 L8.1-VDD
  Top 0.813: VCCI7.1 92.5,3.5 93.3,4.3 93.3,5.8 | 93.3,5.8 93.3,10.7 92.5,11.5 VCCO7.1 | L8.1-VDD 93.25,5.85 93.3,5.8
N$31
  Top 0.813: L8.4-DIN 89,5.85 SI7.1
N$32
  Top 0.813: L8.2-DOUT 91.45,10.35 90.3,11.5 89.3,11.5 89,11.8 SO7.1
N$33
  Top 0.61: C9.2 1.66,27.74 1.5,27.9
  Top 0.813: GNDI8.1 1.5,20 0.8,20.7 0.8,25.5 | 0.8,25.5 0.8,27.2 1.5,27.9 GNDO8.1 | L9.3-GND 0.95,25.65 0.8,25.5
N$34
  Top 0.61: C9.1 3.46,27.74 5.1,26.1 5.1,24.6 5.2,24.6 L9.1-VDD
  Top 0.813: VCCI8.1 8.5,20 9.3,20.8 9.3,22.3 | 9.3,22.3 9.3,27.2 8.5,28 VCCO8.1 | L9.1-VDD 9.25,22.35 9.3,22.3
N$35
  Top 0.813: L9.4-DIN 5,22.35 SI8.1
N$36
  Top 0.813: L9.2-DOUT 7.45,26.85 6.3,28 5.3,28 5,28.3 SO8.1
N$37
  Top 0.61: C10.2 13.66,27.74 13.5,27.9
  Top 0.813: GNDI9.1 13.5,20 12.8,20.7 12.8,25.5 | 12.8,25.5 12.8,27.2 13.5,27.9 GNDO9.1 | L10.3-GND 12.95,25.65 12.8,25.5
N$38
  Top 0.61: C10.1 15.46,27.74 17.1,26.1 17.1,24.6 17.2,24.6 L10.1-VDD
  Top 0.813: VCCI9.1 20.5,20 21.3,20.8 21.3,22.3 | 21.3,22.3 21.3,27.2 20.5,28 VCCO9.1 | L10.1-VDD 21.25,22.35 21.3,22.3
N$39
  Top 0.813: L10.4-DIN 17,22.35 SI9.1
N$40
  Top 0.813: L10.2-DOUT 19.45,26.85 18.3,28 17.3,28 17,28.3 SO9.1
N$41
  Top 0.61: C11.2 25.66,27.74 25.5,27.9
  Top 0.813: GNDI10.1 25.5,20 24.8,20.7 24.8,25.5 | 24.8,25.5 24.8,27.2 25.5,27.9 GNDO10.1 | L11.3-GND 24.95,25.65 24.8,25.5
N$42
  Top 0.61: C11.1 27.46,27.74 29.1,26.1 29.1,24.6 29.2,24.6 L11.1-VDD
  Top 0.813: VCCI10.1 32.5,20 33.3,20.8 33.3,22.3 | 33.3,22.3 33.3,27.2 32.5,28 VCCO10.1 | L11.1-VDD 33.25,22.35 33.3,22.3
N$43
  Top 0.813: L11.4-DIN 29,22.35 SI10.1
N$44
  Top 0.813: L11.2-DOUT 31.45,26.85 30.3,28 29.3,28 29,28.3 SO10.1
N$45
  Top 0.61: C12.2 37.66,27.74 37.5,27.9
  Top 0.813: GNDI11.1 37.5,20 36.8,20.7 36.8,25.5 | 36.8,25.5 36.8,27.2 37.5,27.9 GNDO11.1 | L12.3-GND 36.95,25.65 36.8,25.5
N$46
  Top 0.61: C12.1 39.46,27.74 41.1,26.1 41.1,24.6 41.2,24.6 L12.1-VDD
  Top 0.813: VCCI11.1 44.5,20 45.3,20.8 45.3,22.3 | 45.3,22.3 45.3,27.2 44.5,28 VCCO11.1 | L12.1-VDD 45.25,22.35 45.3,22.3
N$47
  Top 0.813: L12.4-DIN 41,22.35 SI11.1
N$48
  Top 0.813: L12.2-DOUT 43.45,26.85 42.3,28 41.3,28 41,28.3 SO11.1
N$49
  Top 0.61: C13.2 49.66,27.74 49.5,27.9
  Top 0.813: GNDI12.1 49.5,20 48.8,20.7 48.8,25.5 | 48.8,25.5 48.8,27.2 49.5,27.9 GNDO12.1 | L13.3-GND 48.95,25.65 48.8,25.5
N$50
  Top 0.61: C13.1 51.46,27.74 53.1,26.1 53.1,24.6 53.2,24.6 L13.1-VDD
  Top 0.813: VCCI12.1 56.5,20 57.3,20.8 57.3,22.3 | 57.3,22.3 57.3,27.2 56.5,28 VCCO12.1 | L13.1-VDD 57.25,22.35 57.3,22.3
N$51
  Top 0.813: L13.4-DIN 53,22.35 SI12.1
N$52
  Top 0.813: L13.2-DOUT 55.45,26.85 54.3,28 53.3,28 53,28.3 SO12.1
N$53
  Top 0.61: C14.2 61.66,27.74 61.5,27.9
  Top 0.813: GNDI13.1 61.5,20 60.8,20.7 60.8,25.5 | 60.8,25.5 60.8,27.2 61.5,27.9 GNDO13.1 | L14.3-GND 60.95,25.65 60.8,25.5
N$54
  Top 0.61: C14.1 63.46,27.74 65.1,26.1 65.1,24.6 65.2,24.6 L14.1-VDD
  Top 0.813: VCCI13.1 68.5,20 69.3,20.8 69.3,22.3 | 69.3,22.3 69.3,27.2 68.5,28 VCCO13.1 | L14.1-VDD 69.25,22.35 69.3,22.3
N$55
  Top 0.813: L14.4-DIN 65,22.35 SI13.1
N$56
  Top 0.813: L14.2-DOUT 67.45,26.85 66.3,28 65.3,28 65,28.3 SO13.1
N$57
  Top 0.61: C15.2 73.66,27.74 73.5,27.9
  Top 0.813: GNDI14.1 73.5,20 72.8,20.7 72.8,25.5 | 72.8,25.5 72.8,27.2 73.5,27.9 GNDO14.1 | L15.3-GND 72.95,25.65 72.8,25.5
N$58
  Top 0.61: C15.1 75.46,27.74 77.1,26.1 77.1,24.6 77.2,24.6 L15.1-VDD
  Top 0.813: VCCI14.1 80.5,20 81.3,20.8 81.3,22.3 | 81.3,22.3 81.3,27.2 80.5,28 VCCO14.1 | L15.1-VDD 81.25,22.35 81.3,22.3
N$59
  Top 0.813: L15.4-DIN 77,22.35 SI14.1
N$60
  Top 0.813: L15.2-DOUT 79.45,26.85 78.3,28 77.3,28 77,28.3 SO14.1
N$61
  Top 0.61: C16.2 85.66,27.74 85.5,27.9
  Top 0.813: GNDI15.1 85.5,20 84.8,20.7 84.8,25.5 | 84.8,25.5 84.8,27.2 85.5,27.9 GNDO15.1 | L16.3-GND 84.95,25.65 84.8,25.5
N$62
  Top 0.61: C16.1 87.46,27.74 89.1,26.1 89.1,24.6 89.2,24.6 L16.1-VDD
  Top 0.813: VCCI15.1 92.5,20 93.3,20.8 93.3,22.3 | 93.3,22.3 93.3,27.2 92.5,28 VCCO15.1 | L16.1-VDD 93.25,22.35 93.3,22.3
N$63
  Top 0.813: L16.4-DIN 89,22.35 SI15.1
N$64
  Top 0.813: L16.2-DOUT 91.45,26.85 90.3,28 89.3,28 89,28.3 SO15.1
N$65
  Top 0.61: C17.2 1.66,44.24 1.5,44.4
  Top 0.813: GNDI16.1 1.5,36.5 0.8,37.2 0.8,42 | 0.8,42 0.8,43.7 1.5,44.4 GNDO16.1 | L17.3-GND 0.95,42.15 0.8,42
N$66
  Top 0.61: C17.1 3.46,44.24 5.1,42.6 5.1,41.1 5.2,41.1 L17.1-VDD
  Top 0.813: VCCI16.1 8.5,36.5 9.3,37.3 9.3,38.8 | 9.3,38.8 9.3,43.7 8.5,44.5 VCCO16.1 | L17.1-VDD 9.25,38.85 9.3,38.8
N$67
  Top 0.813: L17.4-DIN 5,38.85 SI16.1
N$68
  Top 0.813: L17.2-DOUT 7.45,43.35 6.3,44.5 5.3,44.5 5,44.8 SO16.1
N$69
  Top 0.61: C18.2 13.66,44.24 13.5,44.4
  Top 0.813: GNDI17.1 13.5,36.5 12.8,37.2 12.8,42 | 12.8,42 12.8,43.7 13.5,44.4 GNDO17.1 | L18.3-GND 12.95,42.15 12.8,42
N$70
  Top 0.61: C18.1 15.46,44.24 17.1,42.6 17.1,41.1 17.2,41.1 L18.1-VDD
  Top 0.813: VCCI17.1 20.5,36.5 21.3,37.3 21.3,38.8 | 21.3,38.8 21.3,43.7 20.5,44.5 VCCO17.1 | L18.1-VDD 21.25,38.85 21.3,38.8
N$71
  Top 0.813: L18.4-DIN 17,38.85 SI17.1
N$72
  Top 0.813: L18.2-DOUT 19.45,43.35 18.3,44.5 17.3,44.5 17,44.8 SO17.1
N$73
  Top 0.61: C19.2 25.66,44.24 25.5,44.4
  Top 0.813: GNDI18.1 25.5,36.5 24.8,37.2 24.8,42 | 24.8,42 24.8,43.7 25.5,44.4 GNDO18.1 | L19.3-GND 24.95,42.15 24.8,42
N$74
  Top 0.61: C19.1 27.46,44.24 29.1,42.6 29.1,41.1 29.2,41.1 L19.1-VDD
  Top 0.813: VCCI18.1 32.5,36.5 33.3,37.3 33.3,38.8 | 33.3,38.8 33.3,43.7 32.5,44.5 VCCO18.1 | L19.1-VDD 33.25,38.85 33.3,38.8
N$75
  Top 0.813: L19.4-DIN 29,38.85 SI18.1
N$76
  Top 0.813: L19.2-DOUT 31.45,43.35 30.3,44.5 29.3,44.5 29,44.8 SO18.1
N$77
  Top 0.61: C20.2 37.66,44.24 37.5,44.4
  Top 0.813: GNDI19.1 37.5,36.5 36.8,37.2 36.8,42 | 36.8,42 36.8,43.7 37.5,44.4 GNDO19.1 | L20.3-GND 36.95,42.15 36.8,42
N$78
  Top 0.61: C20.1 39.46,44.24 41.1,42.6 41.1,41.1 41.2,41.1 L20.1-VDD
  Top 0.813: VCCI19.1 44.5,36.5 45.3,37.3 45.3,38.8 | 45.3,38.8 45.3,43.7 44.5,44.5 VCCO19.1 | L20.1-VDD 45.25,38.85 45.3,38.8
N$79
  Top 0.813: L20.4-DIN 41,38.85 SI19.1
N$80
  Top 0.813: L20.2-DOUT 43.45,43.35 42.3,44.5 41.3,44.5 41,44.8 SO19.1
N$81
  Top 0.61: C21.2 49.66,44.24 49.5,44.4
  Top 0.813: GNDI20.1 49.5,36.5 48.8,37.2 48.8,42 | 48.8,42 48.8,43.7 49.5,44.4 GNDO20.1 | L21.3-GND 48.95,42.15 48.8,42
N$82
  Top 0.61: C21.1 51.46,44.24 53.1,42.6 53.1,41.1 53.2,41.1 L21.1-VDD
  Top 0.813: VCCI20.1 56.5,36.5 57.3,37.3 57.3,38.8 | 57.3,38.8 57.3,43.7 56.5,44.5 VCCO20.1 | L21.1-VDD 57.25,38.85 57.3,38.8
N$83
  Top 0.813: L21.4-DIN 53,38.85 SI20.1
N$84
  Top 0.813: L21.2-DOUT 55.45,43.35 54.3,44.5 53.3,44.5 53,44.8 SO20.1
N$85
  Top 0.61: C22.2 61.66,44.24 61.5,44.4
  Top 0.813: GNDI21.1 61.5,36.5 60.8,37.2 60.8,42 | 60.8,42 60.8,43.7 61.5,44.4 GNDO21.1 | L22.3-GND 60.95,42.15 60.8,42
N$86
  Top 0.61: C22.1 63.46,44.24 65.1,42.6 65.1,41.1 65.2,41.1 L22.1-VDD
  Top 0.813: VCCI21.1 68.5,36.5 69.3,37.3 69.3,38.8 | 69.3,38.8 69.3,43.7 68.5,44.5 VCCO21.1 | L22.1-VDD 69.25,38.85 69.3,38.8
N$87
  Top 0.813: L22.4-DIN 65,38.85 SI21.1
N$88
  Top 0.813: L22.2-DOUT 67.45,43.35 66.3,44.5 65.3,44.5 65,44.8 SO21.1
N$89
  Top 0.61: C23.2 73.66,44.24 73.5,44.4
  Top 0.813: GNDI22.1 73.5,36.5 72.8,37.2 72.8,42 | 72.8,42 72.8,43.7 73.5,44.4 GNDO22.1 | L23.3-GND 72.95,42.15 72.8,42
N$90
  Top 0.61: C23.1 75.46,44.24 77.1,42.6 77.1,41.1 77.2,41.1 L23.1-VDD
  Top 0.813: VCCI22.1 80.5,36.5 81.3,37.3 81.3,38.8 | 81.3,38.8 81.3,43.7 80.5,44.5 VCCO22.1 | L23.1-VDD 81.25,38.85 81.3,38.8
N$91
  Top 0.813: L23.4-DIN 77,38.85 SI22.1
N$92
  Top 0.813: L23.2-DOUT 79.45,43.35 78.3,44.5 77.3,44.5 77,44.8 SO22.1
N$93
  Top 0.61: C24.2 85.66,44.24 85.5,44.4
  Top 0.813: GNDI23.1 85.5,36.5 84.8,37.2 84.8,42 | 84.8,42 84.8,43.7 85.5,44.4 GNDO23.1 | L24.3-GND 84.95,42.15 84.8,42
N$94
  Top 0.61: C24.1 87.46,44.24 89.1,42.6 89.1,41.1 89.2,41.1 L24.1-VDD
  Top 0.813: VCCI23.1 92.5,36.5 93.3,37.3 93.3,38.8 | 93.3,38.8 93.3,43.7 92.5,44.5 VCCO23.1 | L24.1-VDD 93.25,38.85 93.3,38.8
N$95
  Top 0.813: L24.4-DIN 89,38.85 SI23.1
N$96
  Top 0.813: L24.2-DOUT 91.45,43.35 90.3,44.5 89.3,44.5 89,44.8 SO23.1
N$97
  Top 0.61: C25.2 1.66,60.74 1.5,60.9
  Top 0.813: GNDI24.1 1.5,53 0.8,53.7 0.8,58.5 | 0.8,58.5 0.8,60.2 1.5,60.9 GNDO24.1 | L25.3-GND 0.95,58.65 0.8,58.5
N$98
  Top 0.61: C25.1 3.46,60.74 5.1,59.1 5.1,57.6 5.2,57.6 L25.1-VDD
  Top 0.813: VCCI24.1 8.5,53 9.3,53.8 9.3,55.3 | 9.3,55.3 9.3,60.2 8.5,61 VCCO24.1 | L25.1-VDD 9.25,55.35 9.3,55.3
N$99
  Top 0.813: L25.4-DIN 5,55.35 SI24.1
N$100
  Top 0.813: L25.2-DOUT 7.45,59.85 6.3,61 5.3,61 5,61.3 SO24.1
N$101
  Top 0.61: C26.2 13.66,60.74 13.5,60.9
  Top 0.813: GNDI25.1 13.5,53 12.8,53.7 12.8,58.5 | 12.8,58.5 12.8,60.2 13.5,60.9 GNDO25.1 | L26.3-GND 12.95,58.65 12.8,58.5
N$102
  Top 0.61: C26.1 15.46,60.74 17.1,59.1 17.1,57.6 17.2,57.6 L26.1-VDD
  Top 0.813: VCCI25.1 20.5,53 21.3,53.8 21.3,55.3 | 21.3,55.3 21.3,60.2 20.5,61 VCCO25.1 | L26.1-VDD 21.25,55.35 21.3,55.3
N$103
  Top 0.813: L26.4-DIN 17,55.35 SI25.1
N$104
  Top 0.813: L26.2-DOUT 19.45,59.85 18.3,61 17.3,61 17,61.3 SO25.1
N$105
  Top 0.61: C27.2 25.66,60.74 25.5,60.9
  Top 0.813: GNDI26.1 25.5,53 24.8,53.7 24.8,58.5 | 24.8,58.5 24.8,60.2 25.5,60.9 GNDO26.1 | L27.3-GND 24.95,58.65 24.8,58.5
N$106
  Top 0.61: C27.1 27.46,60.74 29.1,59.1 29.1,57.6 29.2,57.6 L27.1-VDD
  Top 0.813: VCCI26.1 32.5,53 33.3,53.8 33.3,55.3 | 33.3,55.3 33.3,60.2 32.5,61 VCCO26.1 | L27.1-VDD 33.25,55.35 33.3,55.3
N$107
  Top 0.813: L27.4-DIN 29,55.35 SI26.1
N$108
  Top 0.813: L27.2-DOUT 31.45,59.85 30.3,61 29.3,61 29,61.3 SO26.1
N$109
  Top 0.61: C28.2 37.66,60.74 37.5,60.9
  Top 0.813: GNDI27.1 37.5,53 36.8,53.7 36.8,58.5 | 36.8,58.5 36.8,60.2 37.5,60.9 GNDO27.1 | L28.3-GND 36.95,58.65 36.8,58.5
N$110
  Top 0.61: C28.1 39.46,60.74 41.1,59.1 41.1,57.6 41.2,57.6 L28.1-VDD
  Top 0.813: VCCI27.1 44.5,53 45.3,53.8 45.3,55.3 | 45.3,55.3 45.3,60.2 44.5,61 VCCO27.1 | L28.1-VDD 45.25,55.35 45.3,55.3
N$111
  Top 0.813: L28.4-DIN 41,55.35 SI27.1
N$112
  Top 0.813: L28.2-DOUT 43.45,59.85 42.3,61 41.3,61 41,61.3 SO27.1
N$113
  Top 0.61: C29.2 49.66,60.74 49.5,60.9
  Top 0.813: GNDI28.1 49.5,53 48.8,53.7 48.8,58.5 | 48.8,58.5 48.8,60.2 49.5,60.9 GNDO28.1 | L29.3-GND 48.95,58.65 48.8,58.5
N$114
  Top 0.61: C29.1 51.46,60.74 53.1,59.1 53.1,57.6 53.2,57.6 L29.1-VDD
  Top 0.813: VCCI28.1 56.5,53 57.3,53.8 57.3,55.3 | 57.3,55.3 57.3,60.2 56.5,61 VCCO28.1 | L29.1-VDD 57.25,55.35 57.3,55.3
N$115
  Top 0.813: L29.4-DIN 53,55.35 SI28.1
N$116
  Top 0.813: L29.2-DOUT 55.45,59.85 54.3,61 53.3,61 53,61.3 SO28.1
N$117
  Top 0.61: C30.2 61.66,60.74 61.5,60.9
  Top 0.813: GNDI29.1 61.5,53 60.8,53.7 60.8,58.5 | 60.8,58.5 60.8,60.2 61.5,60.9 GNDO29.1 | L30.3-GND 60.95,58.65 60.8,58.5
N$118
  Top 0.61: C30.1 63.46,60.74 65.1,59.1 65.1,57.6 65.2,57.6 L30.1-VDD
  Top 0.813: VCCI29.1 68.5,53 69.3,53.8 69.3,55.3 | 69.3,55.3 69.3,60.2 68.5,61 VCCO29.1 | L30.1-VDD 69.25,55.35 69.3,55.3
N$119
  Top 0.813: L30.4-DIN 65,55.35 SI29.1
N$120
  Top 0.813: L30.2-DOUT 67.45,59.85 66.3,61 65.3,61 65,61.3 SO29.1
N$121
  Top 0.61: C31.2 73.66,60.74 73.5,60.9
  Top 0.813: GNDI30.1 73.5,53 72.8,53.7 72.8,58.5 | 72.8,58.5 72.8,60.2 73.5,60.9 GNDO30.1 | L31.3-GND 72.95,58.65 72.8,58.5
N$122
  Top 0.61: C31.1 75.46,60.74 77.1,59.1 77.1,57.6 77.2,57.6 L31.1-VDD
  Top 0.813: VCCI30.1 80.5,53 81.3,53.8 81.3,55.3 | 81.3,55.3 81.3,60.2 80.5,61 VCCO30.1 | L31.1-VDD 81.25,55.35 81.3,55.3
N$123
  Top 0.813: L31.4-DIN 77,55.35 SI30.1
N$124
  Top 0.813: L31.2-DOUT 79.45,59.85 78.3,61 77.3,61 77,61.3 SO30.1
N$125
  Top 0.61: C32.2 85.66,60.74 85.5,60.9
  Top 0.813: GNDI31.1 85.5,53 84.8,53.7 84.8,58.5 | 84.8,58.5 84.8,60.2 85.5,60.9 GNDO31.1 | L32.3-GND 84.95,58.65 84.8,58.5
N$126
  Top 0.61: C32.1 87.46,60.74 89.1,59.1 89.1,57.6 89.2,57.6 L32.1-VDD
  Top 0.813: VCCI31.1 92.5,53 93.3,53.8 93.3,55.3 | 93.3,55.3 93.3,60.2 92.5,61 VCCO31.1 | L32.1-VDD 93.25,55.35 93.3,55.3
N$127
  Top 0.813: L32.4-DIN 89,55.35 SI31.1
N$128
  Top 0.813: L32.2-DOUT 91.45,59.85 90.3,61 89.3,61 89,61.3 SO31.1
N$129
  Top 0.61: C33.2 1.66,77.24 1.5,77.4
  Top 0.813: GNDI32.1 1.5,69.5 0.8,70.2 0.8,75 | 0.8,75 0.8,76.7 1.5,77.4 GNDO32.1 | L33.3-GND 0.95,75.15 0.8,75
N$130
  Top 0.61: C33.1 3.46,77.24 5.1,75.6 5.1,74.1 5.2,74.1 L33.1-VDD
  Top 0.813: VCCI32.1 8.5,69.5 9.3,70.3 9.3,71.8 | 9.3,71.8 9.3,76.7 8.5,77.5 VCCO32.1 | L33.1-VDD 9.25,71.85 9.3,71.8
N$131
  Top 0.813: L33.4-DIN 5,71.85 SI32.1
N$132
  Top 0.813: L33.2-DOUT 7.45,76.35 6.3,77.5 5.3,77.5 5,77.8 SO32.1
N$133
  Top 0.61: C34.2 13.66,77.24 13.5,77.4
  Top 0.813: GNDI33.1 13.5,69.5 12.8,70.2 12.8,75 | 12.8,75 12.8,76.7 13.5,77.4 GNDO33.1 | L34.3-GND 12.95,75.15 12.8,75
N$134
  Top 0.61: C34.1 15.46,77.24 17.1,75.6 17.1,74.1 17.2,74.1 L34.1-VDD
  Top 0.813: VCCI33.1 20.5,69.5 21.3,70.3 21.3,71.8 | 21.3,71.8 21.3,76.7 20.5,77.5 VCCO33.1 | L34.1-VDD 21.25,71.85 21.3,71.8
N$135
  Top 0.813: L34.4-DIN 17,71.85 SI33.1
N$136
  Top 0.813: L34.2-DOUT 19.45,76.35 18.3,77.5 17.3,77.5 17,77.8 SO33.1
N$137
  Top 0.61: C35.2 25.66,77.24 25.5,77.4
  Top 0.813: GNDI34.1 25.5,69.5 24.8,70.2 24.8,75 | 24.8,75 24.8,76.7 25.5,77.4 GNDO34.1 | L35.3-GND 24.95,75.15 24.8,75
N$138
  Top 0.61: C35.1 27.46,77.24 29.1,75.6 29.1,74.1 29.2,74.1 L35.1-VDD
  Top 0.813: VCCI34.1 32.5,69.5 33.3,70.3 33.3,71.8 | 33.3,71.8 33.3,76.7 32.5,77.5 VCCO34.1 | L35.1-VDD 33.25,71.85 33.3,71.8
N$139
  Top 0.813: L35.4-DIN 29,71.85 SI34.1
N$140
  Top 0.813: L35.2-DOUT 31.45,76.35 30.3,77.5 29.3,77.5 29,77.8 SO34.1
N$141
  Top 0.61: C36.2 37.66,77.24 37.5,77.4
  Top 0.813: GNDI35.1 37.5,69.5 36.8,70.2 36.8,75 | 36.8,75 36.8,76.7 37.5,77.4 GNDO35.1 | L36.3-GND 36.95,75.15 36.8,75
N$142
  Top 0.61: C36.1 39.46,77.24 41.1,75.6 41.1,74.1 41.2,74.1 L36.1-VDD
  Top 0.813: VCCI35.1 44.5,69.5 45.3,70.3 45.3,71.8 | 45.3,71.8 45.3,76.7 44.5,77.5 VCCO35.1 | L36.1-VDD 45.25,71.85 45.3,71.8
N$143
  Top 0.813: L36.4-DIN 41,71.85 SI35.1
N$144
  Top 0.813: L36.2-DOUT 43.45,76.35 42.3,77.5 41.3,77.5 41,77.8 SO35.1
N$145
  Top 0.61: C37.2 49.66,77.24 49.5,77.4
  Top 0.813: GNDI36.1 49.5,69.5 48.8,70.2 48.8,75 | 48.8,75 48.8,76.7 49.5,77.4 GNDO36.1 | L37.3-GND 48.95,75.15 48.8,75
N$146
  Top 0.61: C37.1 51.46,77.24 53.1,75.6 53.1,74.1 53.2,74.1 L37.1-VDD
  Top 0.813: VCCI36.1 56.5,69.5 57.3,70.3 57.3,71.8 | 57.3,71.8 57.3,76.7 56.5,77.5 VCCO36.1 | L37.1-VDD 57.25,71.85 57.3,71.8
N$147
  Top 0.813: L37.4-DIN 53,71.85 SI36.1
N$148
  Top 0.813: L37.2-DOUT 55.45,76.35 54.3,77.5 53.3,77.5 53,77.8 SO36.1
N$149
  Top 0.61: C38.2 61.66,77.24 61.5,77.4
  Top 0.813: GNDI37.1 61.5,69.5 60.8,70.2 60.8,75 | 60.8,75 60.8,76.7 61.5,77.4 GNDO37.1 | L38.3-GND 60.95,75.15 60.8,75
N$150
  Top 0.61: C38.1 63.46,77.24 65.1,75.6 65.1,74.1 65.2,74.1 L38.1-VDD
  Top 0.813: VCCI37.1 68.5,69.5 69.3,70.3 69.3,71.8 | 69.3,71.8 69.3,76.7 68.5,77.5 VCCO37.1 | L38.1-VDD 69.25,71.85 69.3,71.8
N$151
  Top 0.813: L38.4-DIN 65,71.85 SI37.1
N$152
  Top 0.813: L38.2-DOUT 67.45,76.35 66.3,77.5 65.3,77.5 65,77.8 SO37.1
N$153
  Top 0.61: C39.2 73.66,77.24 73.5,77.4
  Top 0.813: GNDI38.1 73.5,69.5 72.8,70.2 72.8,75 | 72.8,75 72.8,76.7 73.5,77.4 GNDO38.1 | L39.3-GND 72.95,75.15 72.8,75
N$154
  Top 0.61: C39.1 75.46,77.24 77.1,75.6 77.1,74.1 77.2,74.1 L39.1-VDD
  Top 0.813: VCCI38.1 80.5,69.5 81.3,70.3 81.3,71.8 | 81.3,71.8 81.3,76.7 80.5,77.5 VCCO38.1 | L39.1-VDD 81.25,71.85 81.3,71.8
N$155
  Top 0.813: L39.4-DIN 77,71.85 SI38.1
N$156
  Top 0.813: L39.2-DOUT 79.45,76.35 78.3,77.5 77.3,77.5 77,77.8 SO38.1
N$157
  Top 0.61: C40.2 85.66,77.24 85.5,77.4
  Top 0.813: GNDI39.1 85.5,69.5 84.8,70.2 84.8,75 | 84.8,75 84.8,76.7 85.5,77.4 GNDO39.1 | L40.3-GND 84.95,75.15 84.8,75
N$158
  Top 0.61: C40.1 87.46,77.24 89.1,75.6 89.1,74.1 89.2,74.1 L40.1-VDD
  Top 0.813: VCCI39.1 92.5,69.5 93.3,70.3 93.3,71.8 | 93.3,71.8 93.3,76.7 92.5,77.5 VCCO39.1 | L40.1-VDD 93.25,71.85 93.3,71.8
N$159
  Top 0.813: L40.4-DIN 89,71.85 SI39.1
N$160
  Top 0.813: L40.2-DOUT 91.45,76.35 90.3,77.5 89.3,77.5 89,77.8 SO39.1